# Altium PCB Ublox_breakout_pcb.PcbDoc
Units mm, origin at the board's own origin, x right, y up, seen from the top; angles counter-clockwise.
Board outline 39.56 x 32.86 mm, 2 copper layers (Top Layer, Bottom Layer); 11 components, 0 nets, 135 pads, 8 vias.
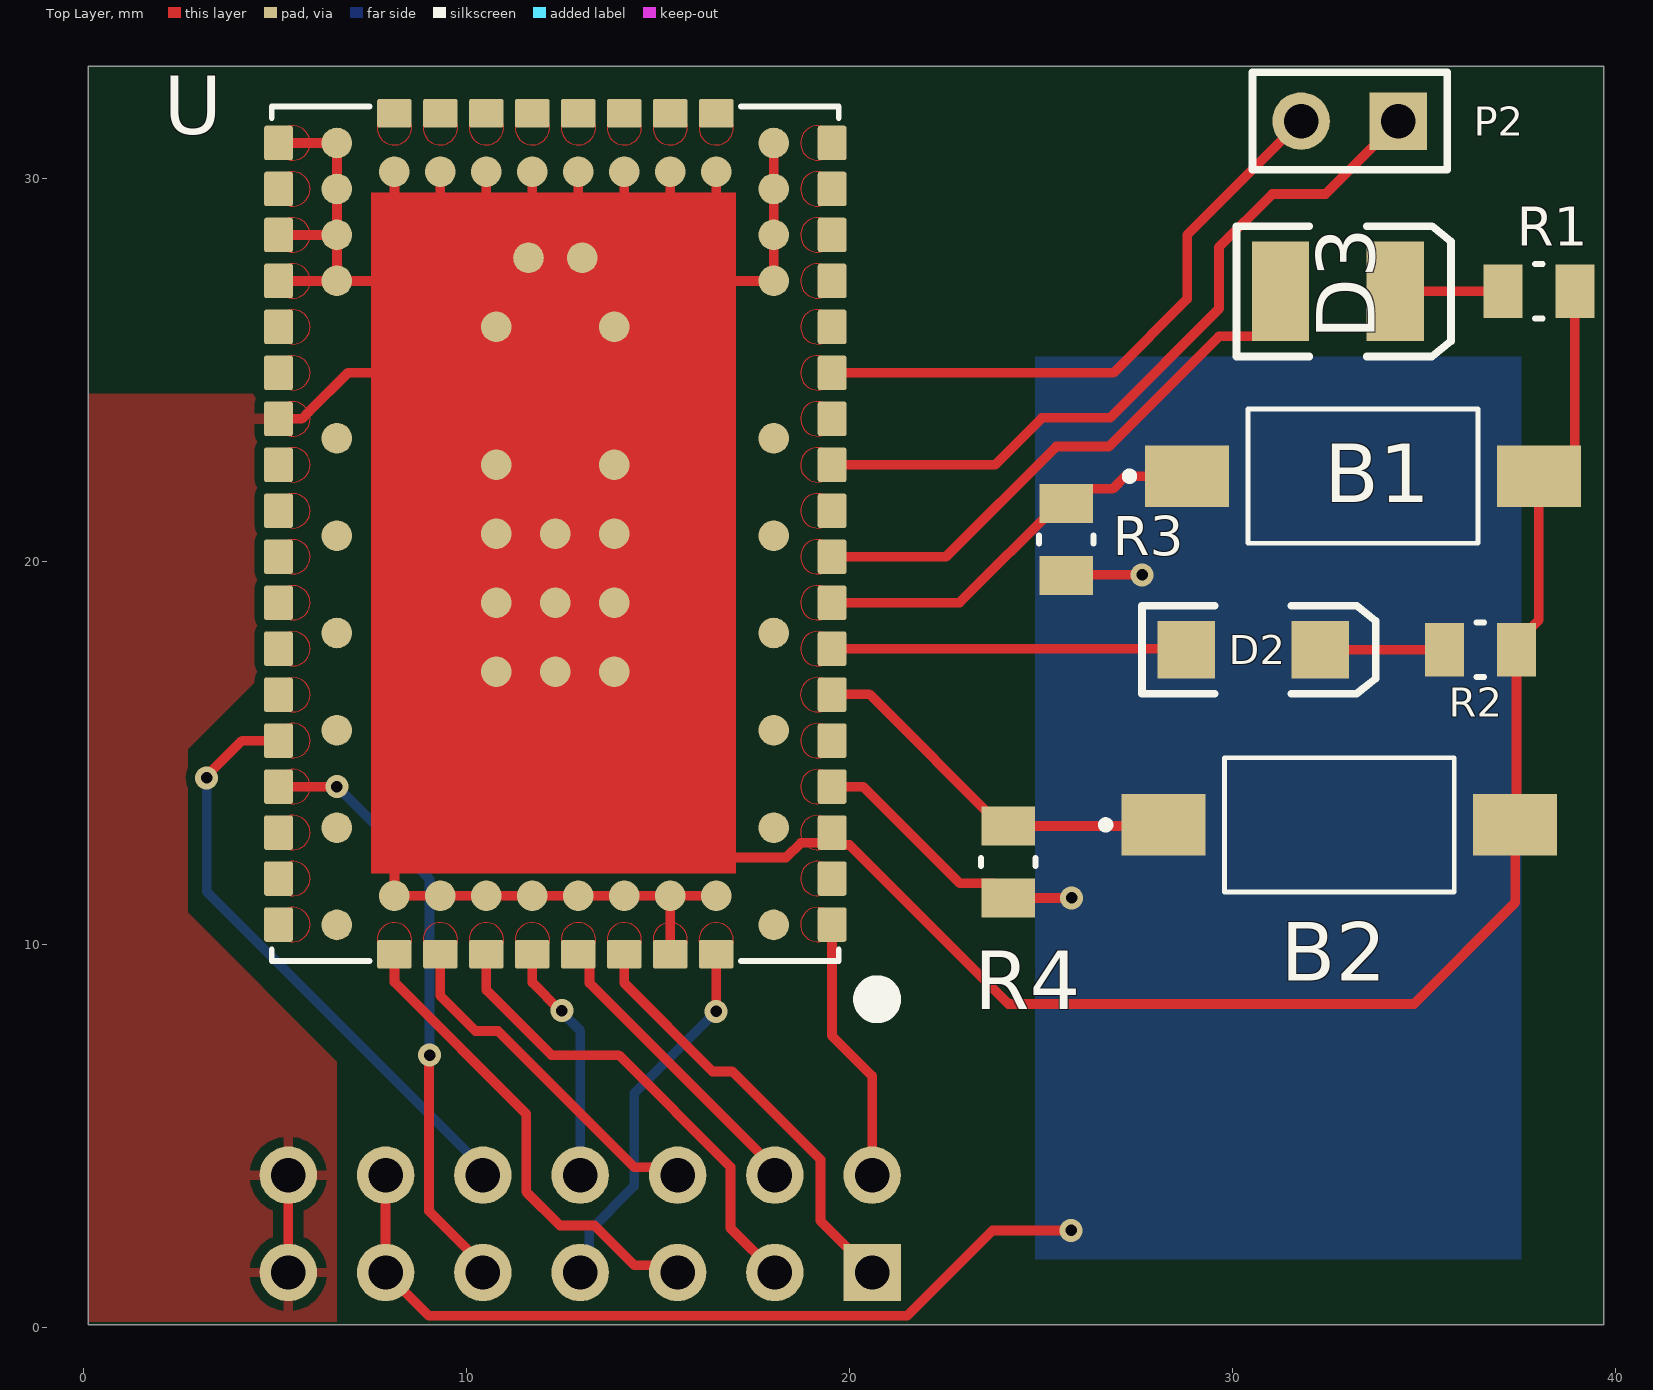
[diagram p0: Top Layer view]
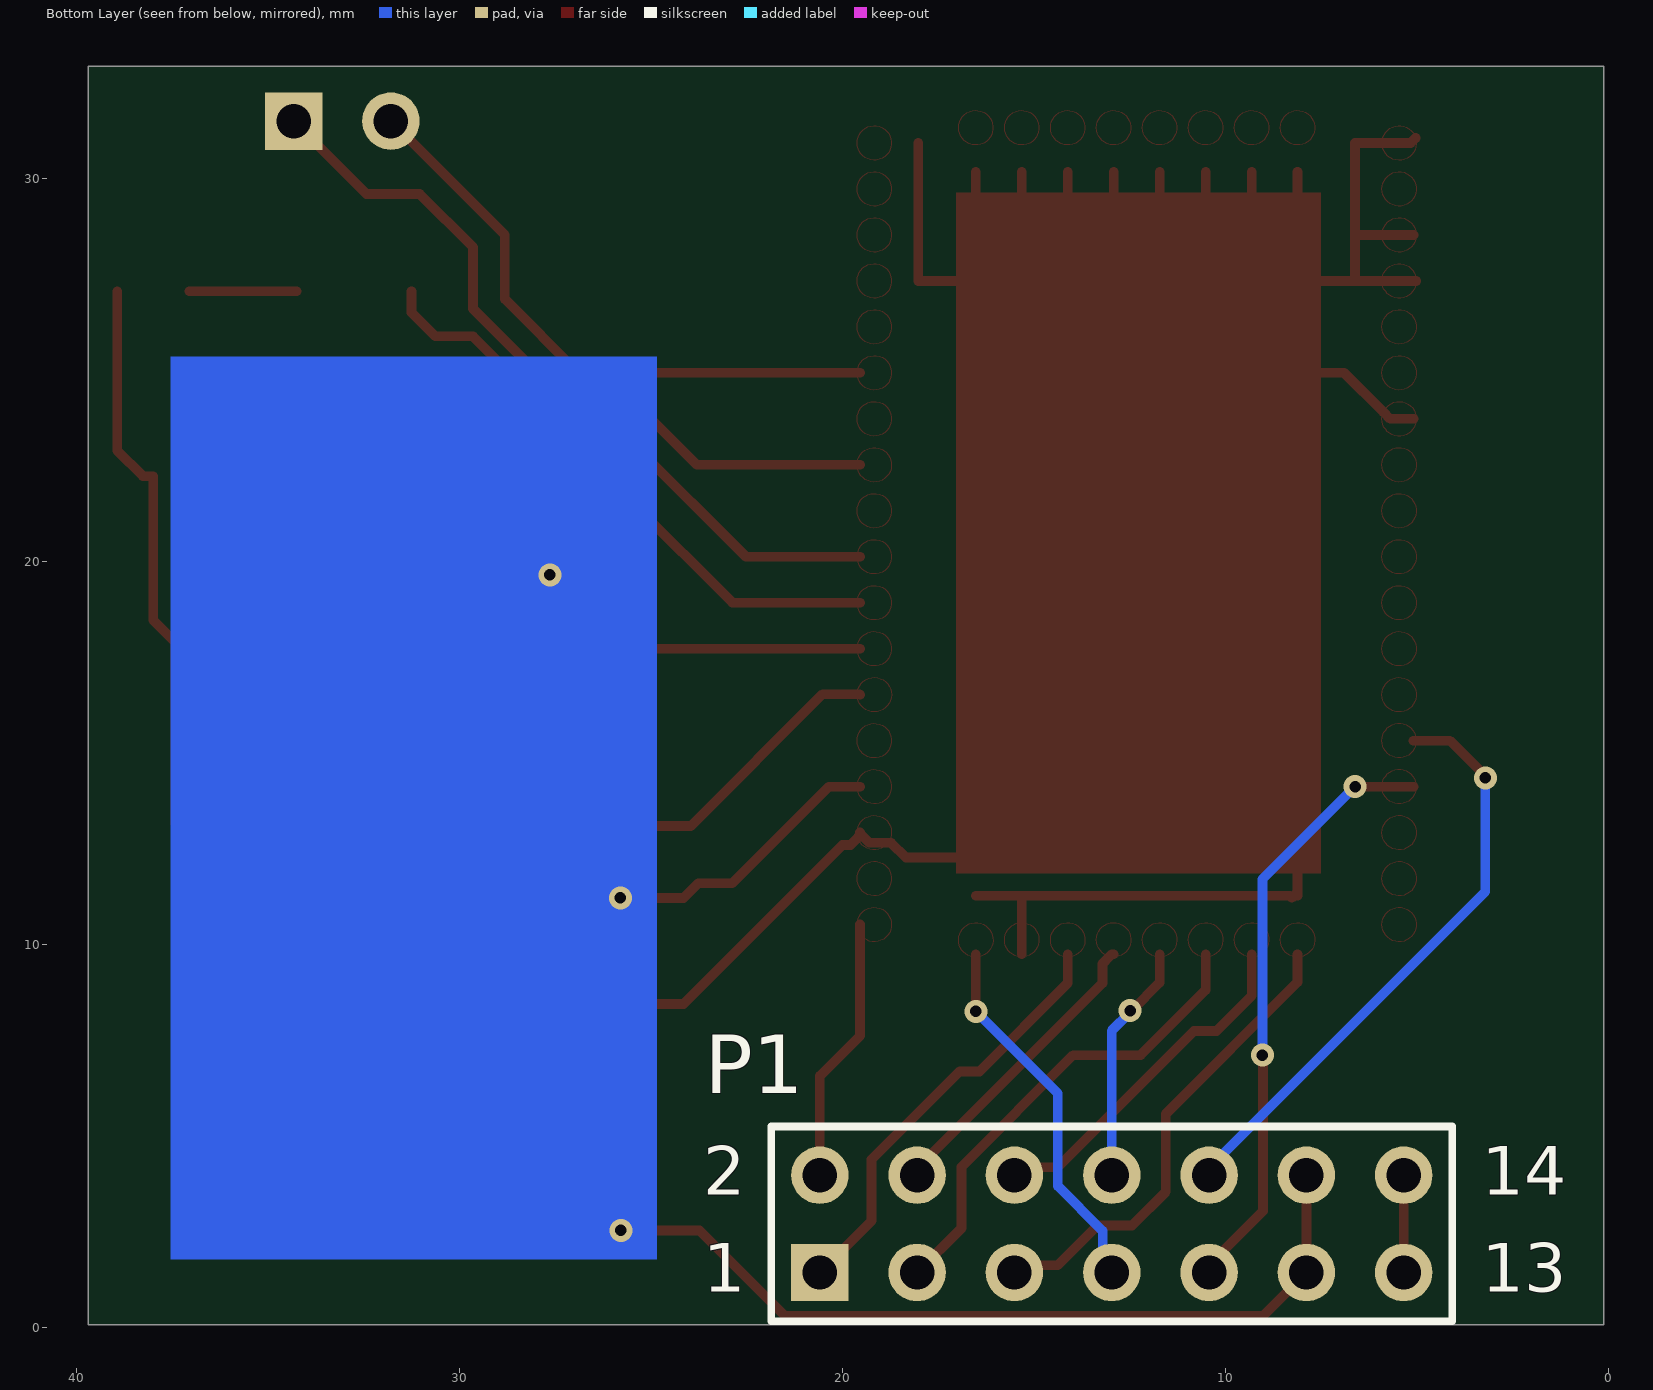
[diagram p1: Bottom Layer view, seen from below]

## Layer stack, top to bottom
Top Solder: solder mask 0.0102, Solder Resist, Dk 3.5
Top Layer: signal copper 0.0356
Dielectric 1: dielectric 0.32, FR-4, Dk 4.8
Bottom Layer: signal copper 0.0356
Bottom Solder: solder mask 0.0102, Solder Resist, Dk 3.5

## Board outline
0.127,0.071 39.687,0.071 39.687,32.927 0.127,32.927

## Design rules (kind name [scope] priority, off if disabled: settings)
Clearance [All] p1: gap=0.15 ignorepadtopadclearanceinfootprint=TRUE except(0: Arc-Hole Track-Hole SMDPad-Hole THPad-Hole Via-Hole Fill-Hole Poly-Hole Region-Hole Text-Hole; 0.125: SMDPad-SMDPad SMDPad-THPad THPad-THPad)
DiffPairsRouting [All] p1: maxlimit=0.254 minlimit=0.254 mostfreqgap=0.254 substack1={D78B0A1F-EA7E-4BED-B5E3-423D3BF88E6B} toplayer_{d78b0a1f-ea7e-4bed-b5e3-423d3bf88e6b}_minwidth=0.381 toplayer_{d78b0a1f-ea7e-4bed-b5e3-423d3bf88e6b}_maxwidth=0.381 toplayer_{d78b0a1f-ea7e-4bed-b5e3-423d3bf88e6b}_prefwidth=0.381 bottomlayer_{d78b0a1f-ea7e-4bed-b5e3-423d3bf88e6b}_minwidth=0.381 bottomlayer_{d78b0a1f-ea7e-4bed-b5e3-423d3bf88e6b}_maxwidth=0.381 bottomlayer_{d78b0a1f-ea7e-4bed-b5e3-423d3bf88e6b}_prefwidth=0.381 toplayer_minwidth=0.381 toplayer_maxwidth=0.381 toplayer_prefwidth=0.381 bottomlayer_minwidth=0.381 bottomlayer_maxwidth=0.381 bottomlayer_prefwidth=0.381 substack2={02E1316C-D713-4793-AEAD-22550BDDB2BD} toplayer_{02e1316c-d713-4793-aead-22550bddb2bd}_minwidth=0.381 toplayer_{02e1316c-d713-4793-aead-22550bddb2bd}_maxwidth=0.381 toplayer_{02e1316c-d713-4793-aead-22550bddb2bd}_prefwidth=0.381 bottomlayer_{02e1316c-d713-4793-aead-22550bddb2bd}_minwidth=0.381 bottomlayer_{02e1316c-d713-4793-aead-22550bddb2bd}_maxwidth=0.381 bottomlayer_{02e1316c-d713-4793-aead-22550bddb2bd}_prefwidth=0.381 substack3={5D768385-70DB-40BA-909C-29BF81FB5ADF} toplayer_{5d768385-70db-40ba-909c-29bf81fb5adf}_minwidth=0.381 toplayer_{5d768385-70db-40ba-909c-29bf81fb5adf}_maxwidth=0.381 toplayer_{5d768385-70db-40ba-909c-29bf81fb5adf}_prefwidth=0.381 bottomlayer_{5d768385-70db-40ba-909c-29bf81fb5adf}_minwidth=0.381 bottomlayer_{5d768385-70db-40ba-909c-29bf81fb5adf}_maxwidth=0.381 bottomlayer_{5d768385-70db-40ba-909c-29bf81fb5adf}_prefwidth=0.381 maxuncoupledlength=12.7
MinimumSolderMaskSliver MinimumSolderMaskSliver_1 [All] p1 off: minsoldermaskwidth=0.254
MinimumSolderMaskSliver [All] p2: minsoldermaskwidth=0.254
PolygonConnect [All] p1: connectstyle=Relief reliefconductorwidth=0.254 reliefentries=4 polygonreliefangle="90 Angle" airgapwidth=0.254
RoutingVias [All] p1: holewidth=0.711 width=1.27 viastyle="Through Hole" minholewidth=0.711 minwidth=1.27 maxholewidth=0.711 maxwidth=1.27
SolderMaskExpansion [All] p1: expansion=0.102 istentingtop=FALSE
Width [All] p1: maxlimit=0.254 minlimit=0.254 preferedwidth=0.254 substack1={D78B0A1F-EA7E-4BED-B5E3-423D3BF88E6B} substack2={02E1316C-D713-4793-AEAD-22550BDDB2BD} substack3={5D768385-70DB-40BA-909C-29BF81FB5ADF}
28 further rules are at their usual default settings.

## Classes and differential pairs
component class Ublox_breakout: B1 B2 D2 P1 P2 R1 R2 R3 R4 U

## Components (designator, comment, footprint, x,y, rotation, side; value= is the part's Value field where it differs from the comment)
B1 "push button" TECO-FSMSM 33.401,22.225 r0 top
B2 "push button" TECO-FSMSM 32.782,13.125 r0 top
D2 "LED2" 3.2X1.6X1.1 30.534,17.697 r0 top
D3 "LED3" 3.5X2.8X1.9 32.748,27.051 r0 top
P1 "Header 7X2" HDR2X7 20.59,1.441 r180 bottom
P2 "Header 2" HDR1X2 34.326,31.496 r180 top
R1 "270" 0805 37.991,27.051 r180 top
R2 "270" 0805 36.465,17.697 r180 top
R3 "1.03k" 0805 25.654,20.574 r90 top
R4 "1.03k" 0805 24.146,12.157 r90 top
U "ODIN-W262" ODIN-W262 12.319,20.723 r90 top (schematic designator *)

## Footprints (in the part's own frame and the unit in brackets; to place one, negate y for a bottom-side part, rotate by r counter-clockwise, add the part's x,y. Pads: shape width x height; smd on the part's side, far side on the other; paste and mask are expansions set on the pad)
3.2X1.6X1.1 [mm]
  rect 1.5x1.5 smd: 1(-1.75,0) 2(1.75,0)
  silkscreen extent -2.9,-1.15 3.2,1.15
3.5X2.8X1.9 [mm] "SM LED; 2 C-Bend Leads; Body 3.5 x 2.8 x 1.9 mm, inc leads (LxWxH typ)"
  rect 1.5x2.6 smd: 1(-1.5,0) 2(1.5,0)
  silkscreen extent -2.65,-1.7 2.95,1.7
0805 [mil]
  rect 40x55 smd: 1(-37,0) 2(37,0)
  silkscreen extent -4,-28 4,28
HDR1X2 [mm] "Connector; Header; 2 Position"
  rect 1.5x1.5 hole 0.9: 1(0,0)
  round 1.5 hole 0.9: 2(2.54,0)
  silkscreen extent -1.27,-1.27 3.81,1.27
HDR2X7 [mm] "Connector; Header; 7x2 Position"
  rect 1.5x1.5 hole 0.9: 1(0,0)
  round 1.5 hole 0.9: 2(0,2.54) 3(2.54,0) 4(2.54,2.54) 5(5.08,0) 6(5.08,2.54) 7(7.62,0) 8(7.62,2.54) 9(10.16,0) 10(10.16,2.54) 11(12.7,0) 12(12.7,2.54) 13(15.24,0) 14(15.24,2.54)
  silkscreen extent -1.27,-1.27 16.51,3.81
ODIN-W262 [mm]
  round 0.8 smd: 1(6.6,-5.7) 2(7.8,-5.7) 3(9,-5.7) 4(10.2,-5.7) 5(9.45,-4.2) 6(9.45,-3) 7(9.45,-1.8) 8(9.45,-0.6) 9(9.45,0.6) 10(9.45,1.8) 11(9.45,3) 12(9.45,4.2) 13(10.2,5.7) 14(9,5.7) 15(7.8,5.7) 16(6.6,5.7) 17(-9.45,4.2) 18(-9.45,3) 19(-9.45,1.8) 20(-9.45,0.6) 21(-9.45,-0.6) 22(-9.45,-1.8) 23(-9.45,-3) 24(-9.45,-4.2) 25(-3.6,-1.54) 26(-1.8,-1.54) 27(0,-1.54) 28(1.8,-1.54) 29(5.4,-1.54) 30(7.2,-0.7) 31(-3.6,0) 32(-1.8,0) 33(0,0) 34(-3.6,1.54) 35(-1.8,1.54) 36(0,1.54) 37(1.8,1.54) 38(5.4,1.54) 39(7.2,0.7) TP1(2.49,-5.7) TP2(2.49,5.7) TP3(-0.05,-5.7) TP4(-0.05,5.7) TP5(-2.59,-5.7) TP6(-2.59,5.7) TP7(-5.13,-5.7) TP8(-5.13,5.7) TP9(-7.67,-5.7) TP10(-7.67,5.7) TP11(-10.21,-5.7) TP12(-10.21,5.7)
  rrect15% 0.9x0.75 smd paste-1 mask+0: A1(-10.2,-7.225) A2(-9,-7.225) A3(-7.8,-7.225) A4(-6.6,-7.225) A5(-5.4,-7.225) A6(-4.2,-7.225) A7(-3,-7.225) A8(-1.8,-7.225) A9(-0.6,-7.225) A10(0.6,-7.225) A11(1.8,-7.225) A12(3,-7.225) A13(4.2,-7.225) A14(5.4,-7.225) A15(6.6,-7.225) A16(7.8,-7.225) A17(9,-7.225) A18(10.2,-7.225) C1(10.2,7.225) C2(9,7.225) C3(7.8,7.225) C4(6.6,7.225) C5(5.4,7.225) C6(4.2,7.225) C7(3,7.225) C8(1.8,7.225) C9(0.6,7.225) C10(-0.6,7.225) C11(-1.8,7.225) C12(-3,7.225) C13(-4.2,7.225) C14(-5.4,7.225) C15(-6.6,7.225) C16(-7.8,7.225) C17(-9,7.225) C18(-10.2,7.225)
  rrect15% 0.75x0.9 smd paste-1 mask+0: B1(10.975,-4.2) B2(10.975,-3) B3(10.975,-1.8) B4(10.975,-0.6) B5(10.975,0.6) B6(10.975,1.8) B7(10.975,3) B8(10.975,4.2) D1(-10.975,4.2) D2(-10.975,3) D3(-10.975,1.8) D4(-10.975,0.6) D5(-10.975,-0.6) D6(-10.975,-1.8) D7(-10.975,-3) D8(-10.975,-4.2)
  Top Layer circle w0: c-6.6,-6.85 r0.45
  Top Layer circle w0: c7.8,6.85 r0.45
  Top Layer circle w0: c-1.8,-6.85 r0.45
  Top Layer circle w0: c-3,-6.85 r0.45
  Top Layer circle w0: c-0.6,-6.85 r0.45
  Top Layer circle w0: c4.2,-6.85 r0.45
  Top Layer circle w0: c0.6,-6.85 r0.45
  Top Layer circle w0: c3,-6.85 r0.45
  Top Layer circle w0: c5.4,-6.85 r0.45
  Top Layer circle w0: c6.6,-6.85 r0.45
  Top Layer circle w0: c7.8,-6.85 r0.45
  Top Layer circle w0: c9,-6.85 r0.45
  Top Layer circle w0: c10.2,-6.85 r0.45
  Top Layer circle w0: c-9,-6.85 r0.45
  Top Layer circle w0: c-5.4,-6.85 r0.45
  Top Layer circle w0: c1.8,6.85 r0.45
  Top Layer circle w0: c0.6,6.85 r0.45
  Top Layer circle w0: c-0.6,6.85 r0.45
  Top Layer circle w0: c-1.8,6.85 r0.45
  Top Layer circle w0: c-3,6.85 r0.45
  Top Layer circle w0: c-4.2,6.85 r0.45
  Top Layer circle w0: c-7.8,6.85 r0.45
  Top Layer circle w0: c-9,6.85 r0.45
  Top Layer circle w0: c-10.2,6.85 r0.45
  Top Layer circle w0: c9,6.85 r0.45
  Top Layer circle w0: c5.4,6.85 r0.45
  Top Layer circle w0: c4.2,6.85 r0.45
  Top Layer circle w0: c10.6,-4.2 r0.45
  Top Layer circle w0: c10.6,-3 r0.45
  Top Layer circle w0: c10.6,-1.8 r0.45
  Top Layer circle w0: c10.6,-0.6 r0.45
  Top Layer circle w0: c10.6,0.6 r0.45
  Top Layer circle w0: c10.6,1.8 r0.45
  Top Layer circle w0: c10.6,3 r0.45
  Top Layer circle w0: c10.6,4.2 r0.45
  Top Layer lines w0: -6.6,7.3 cw(c-6.6,6.85) -6.6,6.4 cw(c-6.6,6.85) -6.6,7.3 ; -5.4,7.3 cw(c-5.4,6.85) -5.4,6.4 cw(c-5.4,6.85) -5.4,7.3 ; 3,7.3 cw(c3,6.85) 3.18,6.437 cw(c3,6.85) 3,6.4 cw(c3,6.85) 3,7.3 ; 6.6,7.3 cw(c6.6,6.85) 6.6,6.4 cw(c6.6,6.85) 6.6,7.3 ; 10.331,7.281 cw(c10.2,6.85) 10.2,6.4 cw(c10.2,6.85) 10.331,7.281 ; -11.05,4.2 cw(c-10.6,4.2) -10.6,3.75 cw(c-10.6,4.2) -11.05,4.2 ; -11.05,3 ccw(c-10.6,3) -10.6,2.55 ccw(c-10.6,3) -11.05,3 ; -11.05,1.8 ccw(c-10.6,1.8) -10.6,1.35 ccw(c-10.6,1.8) -11.05,1.8 ; -11.05,0.6 cw(c-10.6,0.6) -10.6,0.15 cw(c-10.6,0.6) -11.05,0.6 ; -11.037,-0.708 ccw(c-10.6,-0.6) -10.6,-1.05 ccw(c-10.6,-0.6) -11.037,-0.708 ; -11.05,-1.8 ccw(c-10.6,-1.8) -10.6,-2.25 ccw(c-10.6,-1.8) -11.05,-1.8 ; -10.15,-3 cw(c-10.6,-3) -10.6,-3.45 cw(c-10.6,-3) -10.15,-3 ; -11.05,-4.2 cw(c-10.6,-4.2) -10.6,-4.65 cw(c-10.6,-4.2) -11.05,-4.2 ; -8.067,-6.488 cw(c-7.8,-6.85) -7.8,-7.3 cw(c-7.8,-6.85) -7.931,-7.281 cw(c-7.8,-6.85) -8.067,-6.488 ; -10.449,-7.225 ccw(c-10.2,-6.85) -10.2,-7.3 ccw(c-10.2,-6.85) -10.449,-7.225 ; 1.931,-7.281 cw(c1.8,-6.85) 1.8,-7.3 cw(c1.8,-6.85) 1.798,-7.3 cw(c1.8,-6.85) 1.931,-7.281 ; -4.2,-7.3 ccw(c-4.2,-6.85) -4.188,-7.3 ccw(c-4.2,-6.85) -4.2,-7.3
  silkscreen extent -12.4,-8.65 11.15,7.4
TECO-FSMSM [mm]
  rect 2.19x1.6 smd: 1(-4.59,0) 2(4.59,0)
  silkscreen extent -6.2,-1.75 3,1.75

## Part data
B1 B2: library part Teco-FSMSM
D2: library part "LED RED SMD", "Typical RED, GREEN, YELLOW, AMBER GaAs LED", Color=Red, Current - Test=20mA, Lens Color=Colorless, Package=1206, Voltage - Forward (Vf) (Typ)=1.7V, Lens Transparency=Clear
D3: "Typical BLUE SiC LED", DatasheetVersion=16-Apr-2002, LatestRevisionDate=17-Dec-2003, LatestRevisionNote="PCB Footprint replaced.", PackageDescription="SM LED; 2 C-Bend Leads; Body 3.5 x 2.8 x 1.9 mm, inc leads (LxWxH typ)", PackageReference=3.5X2.8X1.9, PackageVersion=16-Apr-2002, Published=8-Jun-2000, Publisher="Altium Limited"
P1: "Header, 7-Pin, Dual row", LatestRevisionDate=17-Jul-2002, LatestRevisionNote="Re-released for DXP Platform.", Publisher="Altium Limited"
P2: "Header, 2-Pin", LatestRevisionDate=17-Jul-2002, LatestRevisionNote="Re-released for DXP Platform.", Publisher="Altium Limited"
R1 R2: library part "RES 270 1/8W", "RES SMD 270 OHM 5% 1/8W 0805", Package=0805, Power (Watts)=0.125W, Tolerance=5%
R3 R4: library part "RES 1k 1/8W", "RES SMD 1K OHM 5% 1/8W 0805"

## Via types
v1: diameter 0.6, hole 0.3, Top Layer to Bottom Layer, 8 vias

## Nets (pads, with @x,y where several pads share a name; then routed paths per layer and width w, separated by ;. In a path a pad name is that pad's centre, name@x,y a point inside that pad or via, vN(x,y) a via of type N, cw(c..) or ccw(c..) an arc to the next point about the centre after c; other vN are vias at no path point)
pads on no net: B1.1 B1.2 B2.1 B2.2 D2.1 D2.2 D3.1 D3.2 P1.1 P1.2 P1.3 P1.4 P1.5 P1.6 P1.7 P1.8 P1.9 P1.10 P1.11 P1.12 P1.13 P1.14 P2.1 P2.2 R1.1 R1.2 R2.1 R2.2 R3.1 R3.2 R4.1 R4.2 U.1 U.2 U.3 U.4 U.5 U.6 U.7 U.8 U.9 U.10 U.11 U.12 U.13 U.14 U.15 U.16 U.17 U.18 U.19 U.20 U.21 U.22 U.23 U.24 U.25 U.26 U.27 U.28 U.29 U.30 U.31 U.32 U.33 U.34 U.35 U.36 U.37 U.38 U.39 U.A1 U.A2 U.A3 U.A4 U.A5 U.A6 U.A7 U.A8 U.A9 U.A10 U.A11 U.A12 U.A13 U.A14 U.A15 U.A16 U.A17 U.A18 U.B1 U.B2 U.B3 U.B4 U.B5 U.B6 U.B7 U.B8 U.C1 U.C2 U.C3 U.C4 U.C5 U.C6 U.C7 U.C8 U.C9 U.C10 U.C11 U.C12 U.C13 U.C14 U.C15 U.C16 U.C17 U.C18 U.D1 U.D2 U.D3 U.D4 U.D5 U.D6 U.D7 U.D8 U.TP1 U.TP2 U.TP3 U.TP4 U.TP5 U.TP6 U.TP7 U.TP8 U.TP9 U.TP10 U.TP11 U.TP12
copper on no net: | length 312
  Top Layer w0.254: v1(3.221,14.351) 3.221,14.397 4.147,15.323 5.019,15.323 5.094,15.323 ; 5.019,27.323 5.094,27.323 5.919,27.323 6.619,27.323 ; 5.038,31.054 5.169,30.923 5.919,30.923 6.619,30.923 6.619,29.723 6.619,28.523 ; 5.094,14.123 5.919,14.123 v1@6.336,14.123 ; 5.094,23.723 5.702,23.723 5.882,23.903 6.902,24.923 8.402,24.923 ; 5.094,28.523 5.919,28.523 6.619,28.523 ; 5.35,1.441 5.35,3.981 ; 7.89,3.981 7.89,1.441 9.021,0.31 21.498,0.31 23.728,2.54 v1(25.781,2.54) ; 8.119,9.748 8.119,9.673 8.119,9.02 11.561,5.578 11.561,3.546 12.44,2.667 13.343,2.667 14.379,1.631 15.32,1.631 15.51,1.441 ; 8.119,11.273 8.119,12.529 ; 8.119,30.173 8.119,29.279 8.144,29.254 9.065,29.254 9.319,29.508 9.319,30.173 ; 8.168,11.322 8.271,11.22 8.324,11.273 9.319,11.273 10.519,11.273 11.719,11.273 12.919,11.273 14.119,11.273 15.319,11.273 ; 8.271,27.222 8.17,27.323 6.619,27.323 ; 8.494,28.523 8.525,28.492 ; v1(9.036,7.112) 9.021,7.097 9.021,3.044 10.43,1.635 10.43,1.441 ; 9.319,9.748 9.319,9.673 9.319,8.664 10.236,7.747 10.821,7.747 14.379,4.189 15.302,4.189 15.51,3.981 ; 10.519,9.748 10.519,9.673 10.519,8.813 12.22,7.112 13.978,7.112 16.895,4.195 16.895,2.596 18.05,1.441 ; 10.519,30.173 10.519,29.165 10.557,29.127 11.338,29.127 11.719,29.508 11.719,30.173 ; 11.719,9.748 11.719,9.673 11.719,9.005 12.447,8.277 v1(12.491,8.277) ; 12.919,9.748 12.966,9.748 13.027,9.686 13.214,9.5 13.214,8.992 18.05,4.156 18.05,3.981 ; 12.919,30.173 12.919,29.178 12.97,29.127 13.738,29.127 14.119,29.508 14.119,30.173 ; 14.119,9.748 14.119,9.673 14.119,8.992 16.421,6.69 16.941,6.69 19.243,4.388 19.243,2.788 20.59,1.441 ; 15.319,9.748 15.319,10.573 15.319,11.273 ; 15.319,30.173 15.319,29.19 16.201,29.19 16.519,29.508 16.519,30.173 ; 16.145,13.252 16.145,13.034 16.907,12.272 18.342,12.272 18.727,12.656 18.807,12.656 19.296,12.656 19.544,12.904 ; 16.399,27.222 16.5,27.323 18.019,27.323 18.019,28.523 18.019,29.723 18.019,30.923 ; v1(16.519,8.255) 16.519,9.673 16.519,9.748 ; 16.519,11.273 15.319,11.273 ; 19.544,10.523 19.544,10.274 19.544,7.62 20.59,6.574 20.59,3.981 ; 19.544,12.923 19.544,12.904 ; 19.544,14.123 19.619,14.123 20.354,14.123 22.879,11.598 23.765,11.598 24.146,11.217 25.794,11.217 v1(25.797,11.22) ; 19.544,16.523 19.556,16.535 19.619,16.535 20.516,16.535 23.955,13.096 24.146,13.096 28.163,13.096 28.192,13.125 ; 19.544,17.723 19.619,17.723 28.184,17.723 28.21,17.697 ; 19.544,18.923 19.619,18.923 22.873,18.923 25.463,21.514 25.654,21.514 26.035,21.895 26.869,21.895 27.199,22.225 28.811,22.225 ; 19.544,20.123 19.619,20.123 22.518,20.123 25.395,23.001 26.767,23.001 29.644,25.878 30.625,25.878 31.248,26.501 31.248,27.051 ; 19.544,22.523 19.619,22.523 23.793,22.523 25.019,23.749 26.797,23.749 29.644,26.596 29.644,28.202 31.033,29.591 32.421,29.591 34.326,31.496 ; 19.544,24.923 19.619,24.923 26.883,24.923 28.811,26.851 28.811,28.521 31.786,31.496 ; 25.463,19.651 25.654,19.651 ; 25.654,19.634 25.67,19.651 v1(27.634,19.651) ; 31.71,17.697 32.284,17.697 35.525,17.697 ; 34.248,27.051 37.051,27.051 ; 38.931,27.051 38.931,22.898 38.258,22.225 37.991,22.225 37.991,18.474 37.405,17.887 37.405,17.697 37.405,13.158 37.372,13.125 37.372,11.092 34.732,8.452 24.146,8.452 19.998,12.6 19.792,12.6 19.6,12.792 19.544,12.848 19.544,12.904 ; 6.619,27.323 6.619,28.523
  Bottom Layer w0.254: v1(3.221,14.351) 3.221,11.381 10.43,4.172 10.43,3.981 ; v1(6.619,14.123) 9.036,11.706 v1(9.036,7.112) ; v1(12.491,8.277) 12.491,8.233 12.97,7.754 12.97,3.981 ; 12.97,1.441 13.208,1.679 13.208,2.525 14.379,3.695 14.379,6.115 v1(16.519,8.255) ; v1@25.781,11.236 v1(25.797,11.22)

## Polygon pours and split planes (outlines as drawn)
no net on Top Layer "GND_L01_P000" (solid, pour order 0): 0.127,24.384 5.469,24.384 5.469,17.845 2.719,15.095 2.719,10.84 6.619,6.94 6.619,0.153 0.127,0.153

## Other copper
Top Layer:
  rectangle: 7.509,11.855 17.034,29.635
Bottom Layer:
  rectangle: 24.844,1.778 37.533,25.351

## Text inside footprints (layer, text, board x,y; h text height)
P1: Bottom Overlay "2" at 23.638,3.473 h1.27; Bottom Overlay "1" at 23.638,0.933 h1.27; Bottom Overlay "14" at 3.318,3.473 h1.27; Bottom Overlay "13" at 3.318,0.933 h1.27